# Altium PCB phantom.PcbDoc
Units mm, origin at the board's own origin, x right, y up, seen from the top; angles counter-clockwise.
Board outline 110 x 140 mm, 4 copper layers (Top, PWR, GND, Bottom), stack 0.778 mm thick; 95 components, 81 nets, 395 pads, 58 vias.
Unrouted connection lines stored in the file: 11.
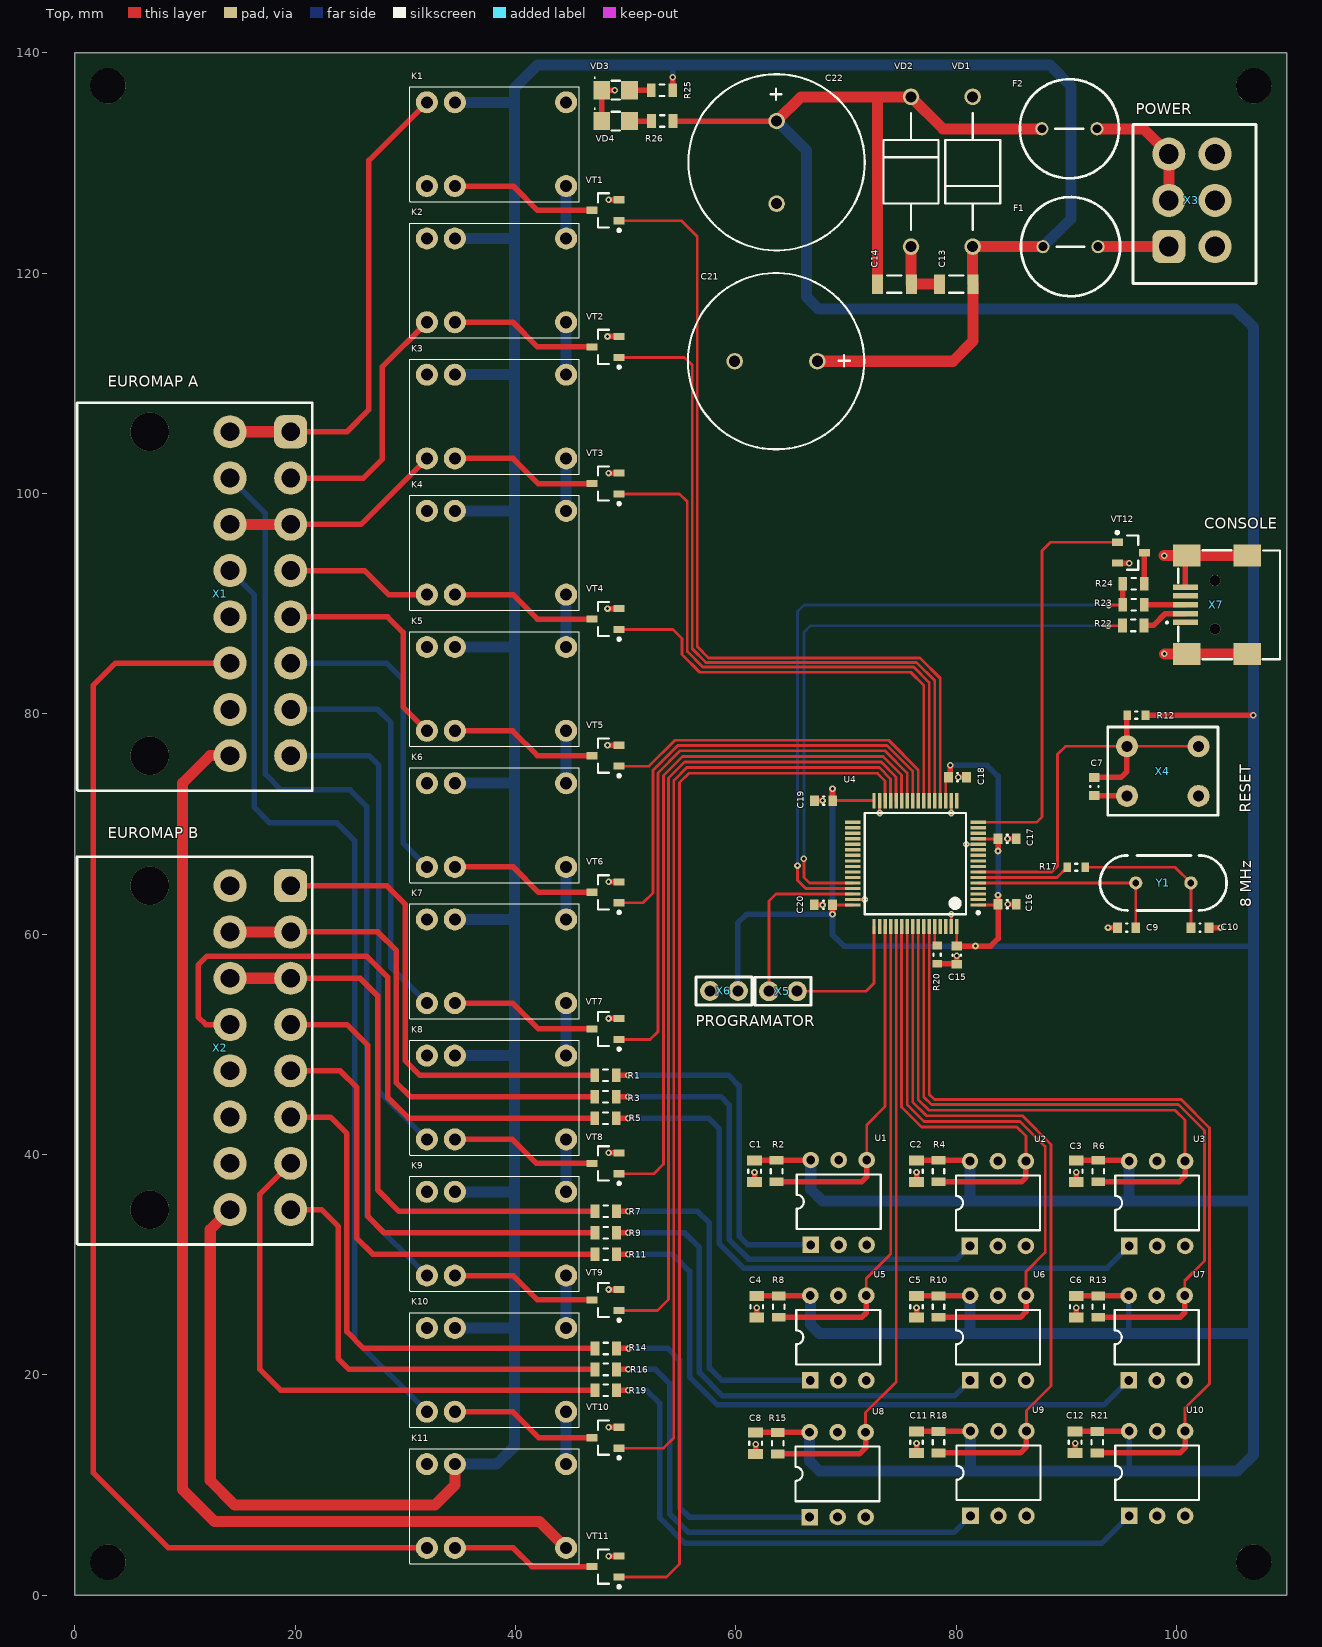
[diagram p0: Top view]
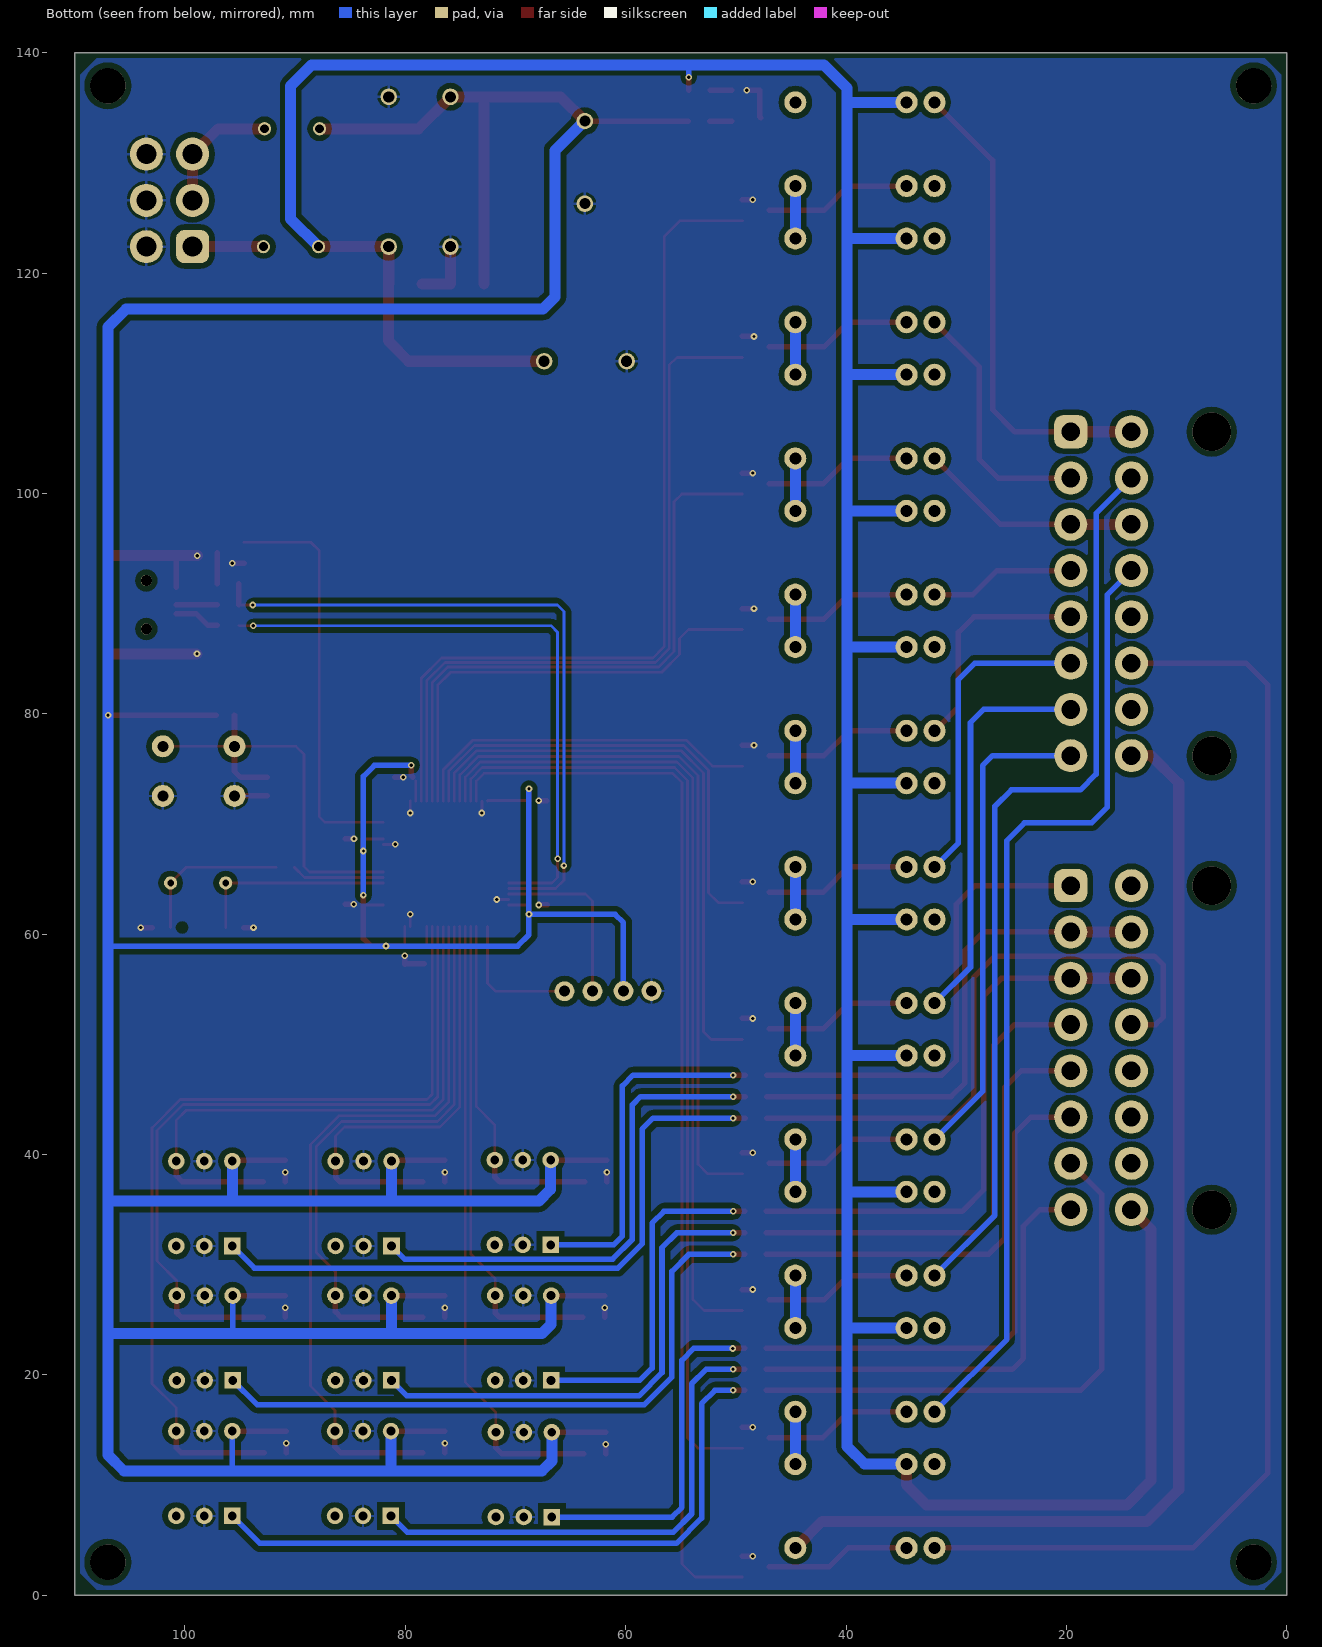
[diagram p1: Bottom view, seen from below]
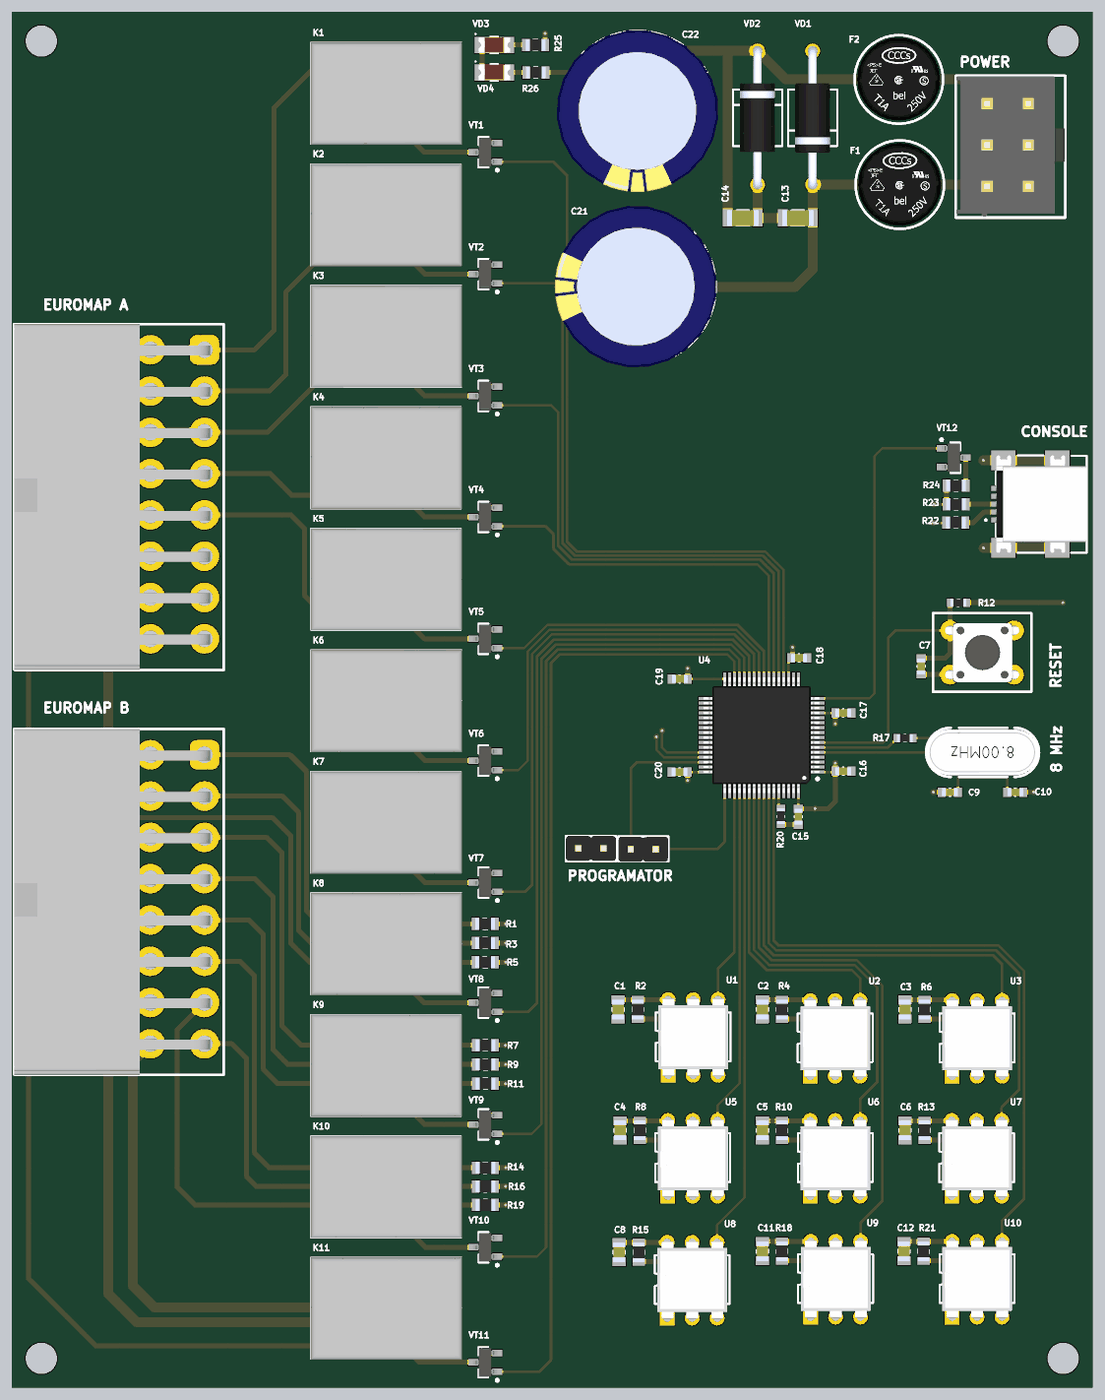
[diagram p2: 3D render of the assembled board from above, using the file's embedded part models]

## Layer stack, top to bottom
Top Solder: solder mask 0.0102, Solder Resist, Dk 3.5
Top: signal copper 0.0356
Dielectric 1: core 0.254, FR-4, Dk 4.2
PWR: signal copper 0.036
Dielectric 3: prepreg 0.127, Dk 4.2
GND: signal copper 0.036
Dielectric 2: core 0.254, Dk 4.2
Bottom: signal copper 0.0356
Bottom Solder: solder mask 0.0102, Solder Resist, Dk 3.5

## Board outline
0,0 110,0 110,140 0,140

## Design rules (kind name [scope] priority, off if disabled: settings)
Clearance [All] p1: gap=0.15 ignorepadtopadclearanceinfootprint=TRUE except(0.254: Via-Poly; 0.5: Track-Poly SMDPad-Poly THPad-Poly)
DiffPairsRouting [All] p1: maxlimit=0.254 minlimit=0.15 mostfreqgap=0.254 toplayer_minwidth=0.15 toplayer_maxwidth=0.381 toplayer_prefwidth=0.254 midlayer1_minwidth=0.15 midlayer1_maxwidth=0.381 midlayer1_prefwidth=0.254 midlayer2_minwidth=0.15 midlayer2_maxwidth=0.381 midlayer2_prefwidth=0.254 bottomlayer_minwidth=0.15 bottomlayer_maxwidth=0.381 bottomlayer_prefwidth=0.254 maxuncoupledlength=12.7
PolygonConnect [All] p1: thpad.connectstyle=Relief thpad.reliefconductorwidth=0.254 thpad.reliefentries=4 thpad.polygonreliefangle="90 Angle" thpad.airgapwidth=0.254 smdpad.connectstyle=Relief smdpad.reliefconductorwidth=0.254 smdpad.reliefentries=4 smdpad.polygonreliefangle="90 Angle" smdpad.airgapwidth=0.254 via.connectstyle=Direct via.reliefconductorwidth=0.254 via.reliefentries=4 via.polygonreliefangle="90 Angle" via.airgapwidth=0.254
RoutingVias [All] p1: holewidth=0.711 width=1.27 viastyle="Through Hole" minholewidth=0.711 minwidth=1.27 maxholewidth=0.711 maxwidth=1.27 useviatemplates=TRUE viatemplateguid#1={D7D14B3E-164A-456C-8CFF-387BE2EA7930} viatemplateguid#2={59AD5054-E988-479E-B6BC-500063E70A10} viatemplatename#1=v50h20m0mx0 viatemplatename#2=v60h30m0mx0
SolderMaskExpansion [All] p1: expansion=0.102
Width [All] p1: maxlimit=1 minlimit=0.254 preferedwidth=0.5 minimp=50.000000 maximp=50.000000 favimp=50.000000
29 further rules are at their usual default settings.

## Components (designator, comment, footprint, x,y, rotation, side; value= is the part's Value field where it differs from the comment)
C1 "0.1" CAPC2012X04N 61.7,38.5 r90 top
C2 "0.1" CAPC2012X04N 76.4,38.5 r90 top
C3 "0.1" CAPC2012X04N 90.9,38.5 r90 top
C4 "0.1" CAPC2012X04N 61.9,26.2 r90 top
C5 "0.1" CAPC2012X04N 76.4,26.2 r90 top
C6 "0.1" CAPC2012X04N 90.9,26.2 r90 top
C7 "0.1" CAPC1608X05N 92.55,73.4 r270 top
C8 "0.1" CAPC2012X04N 61.8,13.8 r90 top
C9 "12pF" CAPC1608X05N 95.475,60.6 r0 top
C10 "12pF" CAPC1608X05N 102.125,60.6 r180 top
C11 "0.1" CAPC2012X04N 76.4,13.9 r90 top
C12 "0.1" CAPC2012X04N 90.8,13.9 r90 top
C13 "0.1x50v" CAPC3216X05N 80,119 r180 top
C14 "0.1x50v" CAPC3216X05N 74.4,119 r0 top
C15 "0.1" CAPC1608X05N 80.05,58.1 r90 top
C16 "0.1" CAPC1608X05N 84.625,62.725 r180 top
C17 "0.1" CAPC1608X05N 84.625,68.65 r180 top
C18 "0.1" CAPC1608X05N 80.125,74.25 r180 top
C19 "0.1" CAPC1608X05N 67.975,72.125 r0 top
C20 "0.1" CAPC1608X05N 67.95,62.65 r0 top
C21 "1000.0x50v" C-LOW-ESR-16-18 67.4,112 r180 top
C22 "1000.0x50v" C-LOW-ESR-16-18 63.7,133.8 r270 top
F1 "RFS-4A" MRT-FUSE 90.4,122.4 r0 top
F2 "RFS-3.15A" MRT-FUSE 90.3,133.1 r0 top
K1 "NRP02-C24DH-S" R_NRP02 34.5,131.7 r0 top locked
K2 "NRP02-C24DH-S" R_NRP02 34.5,119.34 r0 top locked
K3 "NRP02-C24DH-S" R_NRP02 34.5,106.98 r0 top locked
K4 "NRP02-C24DH-S" R_NRP02 34.5,94.62 r0 top locked
K5 "NRP02-C24DH-S" R_NRP02 34.5,82.26 r0 top locked
K6 "NRP02-C24DH-S" R_NRP02 34.5,69.9 r0 top locked
K7 "NRP02-C24DH-S" R_NRP02 34.5,57.54 r0 top locked
K8 "NRP02-C24DH-S" R_NRP02 34.5,45.18 r0 top locked
K9 "NRP02-C24DH-S" R_NRP02 34.5,32.82 r0 top locked
K10 "NRP02-C24DH-S" R_NRP02 34.5,20.46 r0 top locked
K11 "NRP02-C24DH-S" R_NRP02 34.5,8.1 r0 top locked
R1 "4.7k" RESC2012X04N 48.175,47.2 r0 top
R2 "270" RESC2012X04N 63.7,38.5 r270 top
R3 "4.7k" RESC2012X04N 48.175,45.25 r0 top
R4 "270" RESC2012X04N 78.4,38.5 r270 top
R5 "4.7k" RESC2012X04N 48.175,43.3 r0 top
R6 "270" RESC2012X04N 92.9,38.5 r270 top
R7 "4.7k" RESC2012X04N 48.2,34.85 r0 top
R8 "270" RESC2012X04N 63.9,26.2 r270 top
R9 "4.7k" RESC2012X04N 48.2,32.9 r0 top
R10 "270" RESC2012X04N 78.4,26.2 r270 top
R11 "4.7k" RESC2012X04N 48.2,30.95 r0 top
R12 "3k" RESC1608X05N 96.35,79.875 r180 top
R13 "270" RESC2012X04N 92.9,26.2 r270 top
R14 "4.7k" RESC2012X04N 48.2,22.4 r0 top
R15 "270" RESC2012X04N 63.8,13.8 r270 top
R16 "4.7k" RESC2012X04N 48.2,20.5 r0 top
R17 "2.2k" RESC1608X05N 90.9,66.075 r180 top
R18 "270" RESC2012X04N 78.4,13.9 r270 top
R19 "4.7k" RESC2012X04N 48.2,18.6 r0 top
R20 "330" RESC1608X05N 78.275,58.15 r90 top
R21 "270" RESC2012X04N 92.8,13.9 r270 top
R22 "27" RESC2012X04N 96.075,88.025 r0 top
R23 "27" RESC2012X04N 96.1,89.9 r0 top
R24 "1.5k" RESC2012X04N 96.1,91.8 r180 top
R25 "5.6k" RESC2012X04N 53.3,136.6 r0 top
R26 "1k" RESC2012X04N 53.325,133.8 r0 top
U1 "H11L1M" DIP6 66.8,31.8 r90 top
U2 "H11L1M" DIP6 81.25,31.7 r90 top
U3 "H11L1M" DIP6 95.7,31.7 r90 top
U4 "STM32F072RBT6" TSQFP50P1200X1200X160-64N 76.3,66.4 r180 top locked
U5 "H11L1M" DIP6 66.76,19.5 r90 top
U6 "H11L1M" DIP6 81.26,19.5 r90 top
U7 "H11L1M" DIP6 95.66,19.5 r90 top
U8 "H11L1M" DIP6 66.7,7.1 r90 top
U9 "H11L1M" DIP6 81.3,7.2 r90 top
U10 "H11L1M" DIP6 95.7,7.2 r90 top
VD1 "P6KE27CA" P6KE27CA 81.5,136 r270 top
VD2 "P6KE6.8CA-LF" P6KE27CA 75.9,122.4 r90 top
VD3 "FYLS-1206URC (+24 ON)" CAPMP3216X11N 49.1,136.6 r0 top
VD4 "FYLS-1206UEC (+3.3 ON)" CAPMP3216X11N 49.1,133.8 r0 top
VT1 "PDTC114ET.215" SOT95P238X102-3N 48.2,125.7 r180 top
VT2 "PDTC114ET.215" SOT95P238X102-3N 48.2,113.3 r180 top
VT3 "PDTC114ET.215" SOT95P238X102-3N 48.2,100.9 r180 top
VT4 "PDTC114ET.215" SOT95P238X102-3N 48.2,88.6 r180 top
VT5 "PDTC114ET.215" SOT95P238X102-3N 48.2,76.2 r180 top
VT6 "PDTC114ET.215" SOT95P238X102-3N 48.2,63.8 r180 top
VT7 "PDTC114ET.215" SOT95P238X102-3N 48.2,51.4 r180 top
VT8 "PDTC114ET.215" SOT95P238X102-3N 48.2,39.2 r180 top
VT9 "PDTC114ET.215" SOT95P238X102-3N 48.2,26.8 r180 top
VT10 "PDTC114ET.215" SOT95P238X102-3N 48.2,14.3 r180 top
VT11 "PDTC114ET.215" SOT95P238X102-3N 48.2,2.6 r180 top
VT12 "PDTC114ET.215" SOT95P238X102-3N 95.825,94.625 r0 top
X1 "EUROMAP-A (HD CONTROL LOOP)" MINI-FIT-16-WAY-M 19.6,90.9 r90 top locked
X2 "EUROMAP-B (MACHINE CONTROL LOOP)" MINI-FIT-16-WAY-M 19.6,49.7 r90 top locked
X3 "POWER" MINI-FIT-6WAY-SM 101.4,126.6 r270 top
X4 "RESET" "TACT SWITCH" 98.75,74.8 r0 top locked
X5 "Jamper ZL201" ZL201-2 64.275,54.825 r0 top locked
X6 "Jamper ZL201" ZL201-2 58.925,54.85 r180 top locked
X7 "CONSOLE" 229-5FB-MINI-USB 109.4,89.9 r90 top locked
Y1 "8MHz" HC49LT 101.3,64.65 r180 top locked

## Footprints (in the part's own frame and the unit in brackets; to place one, negate y for a bottom-side part, rotate by r counter-clockwise, add the part's x,y. Pads: shape width x height; smd on the part's side, far side on the other; paste and mask are expansions set on the pad)
229-5FB-MINI-USB [mm]
  rect 0.5x2.25 smd: 1(-1.6,8.6) 2(-0.8,8.6) 3(0,8.6) 4(0.8,8.6) 5(1.6,8.6)
  rect 2x2.5 smd: G(-4.45,8.48) G(-4.45,2.98) G(4.45,8.48) G(4.45,2.98)
  round 1 hole 1: M(-2.2,5.9) M(2.2,5.9)
  silkscreen extent -4.95,0 4.95,10.33, body extent -4.95,0 4.95,9.25, height 3.98
C-LOW-ESR-16-18 [mm]
  round 1.5 hole 1: 1(0,0) 2(7.5,0)
  silkscreen extent -4.25,-8 11.75,8, body extent -4.35,-8.27 12.15,8.22, height 26
CAPC1608X05N [mm] "Chip Capacitor, 2-Leads, Body 1,60x0,80mm, IPC Medium Density"
  rect 0.8x0.95 smd: 1(-0.825,0) 2(0.825,0)
  silkscreen extent -0.05,-0.38 0.05,0.38, body extent -0.8,-0.4 0.8,0.4, height 0.9
CAPC2012X04N [mm] "Chip Capacitor, 2-Leads, Body 2,00x1,20mm, IPC Medium Density"
  rect 0.9x1.35 smd: 1(-0.975,0) 2(0.975,0)
  silkscreen extent -0.15,-0.58 0.15,0.58, body extent -1,-0.6 1,0.6, height 0.9
CAPC3216X05N [mm] "Chip Capacitor, 2-Leads, Body 3,20x1,60mm, IPC Medium Density"
  rect 1x1.75 smd: 1(-1.525,0) 2(1.525,0)
  silkscreen extent -0.65,-0.77 0.65,0.77, body extent -1.6,-0.8 1.6,0.8, height 1.3
CAPMP3216X11N [mm] "Molded Capacitor, 2-Leads, Body 3,20x1,60mm, IPC Medium Density"
  rect 1.5x1.65 smd: 1(-1.25,0) 2(1.25,0)
  silkscreen extent -1.95,-0.85 0.38,1.17, body extent -1.6,-0.8 1.6,0.8, height 1.1
DIP6 [mm]
  rect 1.5x1.5 hole 0.8: 1(0,0)
  round 1.5 hole 0.8: 2(0,-2.54) 3(0,-5.08) 4(7.7,-5.08) 5(7.7,-2.54) 6(7.7,0)
  silkscreen extent 1.43,-6.35 6.4,1.27, body extent -0.06,-6.12 7.81,1, height 4.7
HC49LT [mm]
  round 1.2 hole 0.6: 1(0,0) 2(5,0)
  silkscreen extent -3.25,-2.5 8.25,2.5, body extent -3.15,-2.33 8.2,2.32, height 3.6
MINI-FIT-6WAY-SM [mm]
  rrect50% 3x3 hole 1.8: 1(4.2,-2.1)
  round 3 hole 1.8: 2(0,-2.1) 3(-4.2,-2.1) 4(4.2,2.1) 5(0,2.1) 6(-4.2,2.1)
  silkscreen extent -6.88,-5.35 7.55,5.82, body extent -6.82,-5.25 7.47,5.75, height 12.8
MINI-FIT-16-WAY-M [mm]
  rrect50% 3x3 hole 1.7: 1(14.7,0)
  round 3 hole 1.7: 2(10.5,0) 3(6.3,0) 4(2.1,0) 5(-2.1,0) 6(-6.3,0) 7(-10.5,0) 8(-14.7,0) 9(14.7,5.5) 10(10.5,5.5) 11(6.3,5.5) 12(2.1,5.5) 13(-2.1,5.5) 14(-6.3,5.5) 15(-10.5,5.5) 16(-14.7,5.5)
  round 3.5 hole 3.5: ""(-14.7,12.8) ""(14.7,12.8)
  silkscreen extent -17.88,-1.95 17.32,19.4, body extent -17.87,-0.56 17.33,19.38, height 11.4
MRT-FUSE [mm]
  round 1.2 hole 0.8: 1(-2.525,0) 2(2.475,0)
  silkscreen extent -4.52,-4.5 4.47,4.5, body extent -4.27,-4.2 4.18,4.25, height 7.4
P6KE27CA [mm]
  round 1.5 hole 1: A(0,0) K(13.6,0)
  silkscreen extent 1.5,-2.5 12.1,2.5, body extent -0.41,-1.78 14.05,1.78, height 4.78
R_NRP02 [mm]
  round 2 hole 1.1: 1(-2.54,3.8) 2(-2.54,-3.8) 3(10.1,-3.8) 3(10.1,3.8) 5(0,3.8) 6(0,-3.8)
  silkscreen extent -4.1,-5.23 11.27,5.2, body extent -4.07,-5.22 11.32,5.18, height 11.4
RESC1608X05N [mm] "Chip Resistor, 2-Leads, Body 1,60x0,80mm, IPC Medium Density"
  rect 0.7x0.85 smd: 1(-0.825,0) 2(0.825,0)
  silkscreen extent -0.1,-0.33 0.1,0.33, body extent -0.8,-0.4 0.8,0.4, height 0.5
RESC2012X04N [mm] "Chip Resistor, 2-Leads, Body 2,00x1,20mm, IPC Medium Density"
  rect 0.8x1.25 smd: 1(-0.975,0) 2(0.975,0)
  silkscreen extent -0.2,-0.53 0.2,0.53, body extent -1,-0.6 1,0.6, height 0.5
SOT95P238X102-3N [mm] "SOT23, 3-Leads, Body 2,93x2,38mm, Pitch 0,95mm, IPC Medium Density"
  rect 1x0.65 smd: 1(-1.2,0.95) 2(-1.2,-0.95) 3(1.25,0)
  silkscreen extent -1.33,-1.55 0.7,1.95, body extent -1.2,-1.46 1.28,1.46, height 0.99
"TACT SWITCH" [mm]
  round 2 hole 1: 1(-3.25,2.25) 1(3.25,2.25) 2(-3.25,-2.25) 2(3.25,-2.25)
  silkscreen extent -5,-4 5,4, body extent -3.94,-3 4.04,3, height 4.9
TSQFP50P1200X1200X160-64N [mm] "TSQFP, 64-Leads, Body 10,00x10,00mm, Pitch 0,50mm, IPC Medium Density"
  rect 1.4x0.3 smd: 1(-5.7,3.75) 2(-5.7,3.25) 3(-5.7,2.75) 4(-5.7,2.25) 5(-5.7,1.75) 6(-5.7,1.25) 7(-5.7,0.75) 8(-5.7,0.25) 9(-5.7,-0.25) 10(-5.7,-0.75) 11(-5.7,-1.25) 12(-5.7,-1.75) 13(-5.7,-2.25) 14(-5.7,-2.75) 15(-5.7,-3.25) 16(-5.7,-3.75) 33(5.7,-3.75) 34(5.7,-3.25) 35(5.7,-2.75) 36(5.7,-2.25) 37(5.7,-1.75) 38(5.7,-1.25) 39(5.7,-0.75) 40(5.7,-0.25) 41(5.7,0.25) 42(5.7,0.75) 43(5.7,1.25) 44(5.7,1.75) 45(5.7,2.25) 46(5.7,2.75) 47(5.7,3.25) 48(5.7,3.75)
  rect 0.3x1.4 smd: 17(-3.75,-5.7) 18(-3.25,-5.7) 19(-2.75,-5.7) 20(-2.25,-5.7) 21(-1.75,-5.7) 22(-1.25,-5.7) 23(-0.75,-5.7) 24(-0.25,-5.7) 25(0.25,-5.7) 26(0.75,-5.7) 27(1.25,-5.7) 28(1.75,-5.7) 29(2.25,-5.7) 30(2.75,-5.7) 31(3.25,-5.7) 32(3.75,-5.7) 49(3.75,5.7) 50(3.25,5.7) 51(2.75,5.7) 52(2.25,5.7) 53(1.75,5.7) 54(1.25,5.7) 55(0.75,5.7) 56(0.25,5.7) 57(-0.25,5.7) 58(-0.75,5.7) 59(-1.25,5.7) 60(-1.75,5.7) 61(-2.25,5.7) 62(-2.75,5.7) 63(-3.25,5.7) 64(-3.75,5.7)
  silkscreen extent -5.82,-4.6 4.6,4.6, body extent -5.89,-5.89 5.89,5.89, height 1.57
ZL201-2 [mm]
  round 1.8 hole 1: 1(-1.27,0) 2(1.27,0)
  silkscreen extent -2.54,-1.27 2.54,1.27, body extent -2.56,-1.3 2.52,1.24, height 8.54

## Part data
C1 C2 C3 C4 C5 C6 C7 C8 C9 C10 C11 C12 C13 C14 C15 C16 C17 C18 C19 C20: library part C, "SMD конденсатор", Ref=http://www.kosmodrom.com.ua/prodlist.php?name=cap1206
C21 C22: library part C-LOW-ESR-RADIAL, "Выводной электролит"
F1 F2: library part FUSE, "Вставка плавкая", Ref=http://www.kosmodrom.com.ua/el.php?name=RFT-2.5A
K1 K2 K3 K4 K5 K6 K7 K8 K9 K10 K11: "Электромеханическое реле"
R1 R2 R3 R4 R5 R6 R7 R8 R9 R10 R11 R12 R13 R14 R15 R16 R17 R18 R19 R20 R21 R22 R23 R24 R25 R26: library part R, "SMD резистор", Ref=http://www.kosmodrom.com.ua/prodlist.php?name=res1206
U1 U2 U3 U5 U6 U7 U8 U9 U10: "Fairchild H11L1M Schmitt Trigger Output Optocoupler", Ref=http://www.kosmodrom.com.ua/el.php?name=H11L1M
U4: "Микроконтроллер"
VD1: "Cупрессор", Ref=https://prom.ua/p207053054-p6ke27ca;all.html
VD2: library part P6KE27CA, "Cупрессор", Ref=https://prom.ua/p207053054-p6ke27ca;all.html
VD3 VD4: library part FYLS-1206, "Светодиод", Ref=http://www.kosmodrom.com.ua/prodlist.php?page=0&name=FYLS-1206&okbutton=%CF%EE%E8%F1%EA+%EF%EE+%F1%EA%EB%E0%E4%F3
VT1 VT2 VT3 VT4 VT5 VT6 VT7 VT8 VT9 VT10 VT11 VT12: "NPN transistor with bias circuit"
X1 X2: library part MINI-FIT-16-WAY-M
X3: library part MINI-FIT-6-WAY-M
X4: library part "TACT SWITCH"
X7: library part USB-MINI, "Разъем USB-B розетка", Ref=http://www.kosmodrom.com.ua/el.php?name=229-5FB
Y1: library part CERAMIC-RESONATOR, "Кварцевый резонатор", Ref (6MHz)=http://www.kosmodrom.com.ua/el.php?name=KX-13%206.0%20MHz, Ref( 8MHz)=http://www.kosmodrom.com.ua/el.php?name=KX-13-8.0-MHz

## Free pads (board coordinates)
  round 3.2 hole 3.2 unplated: M(3,3) M(3,137) M(107,3) M(107,137)

## Via types
v1: diameter 0.6/0.6/0.6/0.6 (per signal layer), hole 0.3, Top to Bottom, tented both sides, 58 vias

## Nets (pads, with @x,y where several pads share a name; then routed paths per layer and width w, separated by ;. In a path a pad name is that pad's centre, name@x,y a point inside that pad or via, vN(x,y) a via of type N, cw(c..) or ccw(c..) an arc to the next point about the centre after c; other vN are vias at no path point)
+3.3: C1.2 C2.2 C3.2 C4.2 C5.2 C6.2 C8.2 C11.2 C12.2 C14.1 C15.2 C16.2 C17.2 C18.2 C19.2 C20.2 C22.1 F2.1 R2.1 R4.1 R6.1 R8.1 R10.1 R12.1 R13.1 R15.1 R18.1 R21.1 R26.2 U1.6 U2.6 U3.6 U4.1 U4.13 U4.19 U4.32 U4.48 U4.64 U5.6 U6.6 U7.6 U8.6 U9.6 U10.6 VD2.K X6.1 | length 526.9
  Top w0.254: C20.2 U4.48 ; C19.2 72.525,72.125 U4.32 ; U4.19 C18.2@79.05,73.925 ; C15.2 U4.64 ; U4.1 83.725,62.65 C16.2 ; U4.13 C17.2
  Top w0.5: R26.2 C22.1 ; C1.2 66.775,39.475 U1.6 ; C8.2 66.675,14.775 U8.6 ; C4.2 66.735,27.175 U5.6 ; v1(68.775,61.8) C20.2 ; v1(68.775,73.2) 68.775,72.15 C19.2 ; C11.2 81.275,14.875 U9.6 ; C5.2 81.235,27.175 U6.6 ; C2.2 81.175,39.475 U2.6 ; C18.2 79.45,74.4 v1(79.45,75.325) ; C15.2 v1(81.75,58.925) 83.125,58.925 83.8,59.6 C16.2 v1(83.8,63.55) ; v1(83.8,67.55) C17.2 ; C12.2 95.675,14.875 U10.6 ; C6.2 95.635,27.175 U7.6 ; C3.2 95.625,39.475 U3.6 ; R12.1 v1(106.975,79.875)
  Top w1: C22.1 65.9,136 72.8,136 ; C14.1 72.875,135.925 72.8,136 ; F2.1 78.8,133.1 VD2.K 72.8,136
  Bottom w0.5: X6.1 60.195,61.045 60.95,61.8 v1(68.775,61.8) ; v1(68.775,73.2) v1(68.775,61.8) ; v1(79.45,75.325) 82.8,75.325 83.8,74.325 v1(83.8,67.55) v1(83.8,63.55) ; U7.6 95.66,23.765 95.675,23.75 ; 95.7,11.3 U10.6 ; 106.975,58.875 106.925,58.925 v1(81.75,58.925) 69.8,58.925 68.775,59.95 v1(68.775,61.8)
  Bottom w1: C22.1 63.725,133.8 66.4,131.125 66.4,117.85 67.5,116.75 105.325,116.75 106.975,115.1 v1(106.975,79.875) 106.975,58.875 106.975,35.775 ; U8.6 66.7,12.175 67.575,11.3 81.275,11.3 ; U5.6 66.76,24.59 67.6,23.75 81.225,23.75 ; U1.6 66.8,36.85 67.875,35.775 81.175,35.775 ; U2.6 81.25,35.85 81.175,35.775 ; U6.6 81.26,23.785 81.225,23.75 ; U9.6 81.3,11.325 81.275,11.3 ; U3.6 95.7,35.825 95.65,35.775 ; 81.175,35.775 95.65,35.775 ; 81.225,23.75 95.675,23.75 106.975,23.75 ; 81.275,11.3 95.7,11.3 105.55,11.3 106.975,12.725 106.975,23.75 ; 95.65,35.775 106.975,35.775 ; 106.975,23.75 106.975,35.775
+3.3-IN: F2.2 X3.2 X3.3 | length 11.7
  Top w1: F2.2 97,133.1 X3.3 X3.2
+24: F1.2 X3.1 | length 6.6
  Top w0.5: F1.2@92.875,122.5 F1.2@92.975,122.4
  Top w1: F1.2 92.975,122.4 X3.1
BOOT: R20.2 U4.60 | length 2
  Top w0.254: U4.60 78.05,58.975 R20.2
C\O\R\E\-\P\U\L\L\E\R\S\-\I\N\-\P\O\S\-\1\: U4.25 VT6.1 | length 42.7
  Top w0.254: VT6.1 51.575,62.85 52.475,63.75 52.475,74.875 54.725,77.125 73.725,77.125 76.05,74.8 U4.25
C\O\R\E\-\P\U\L\L\E\R\S\-\I\N\-\P\O\S\-\2\: U4.26 VT7.1 | length 54.1
  Top w0.254: VT7.1 52.225,50.45 52.925,51.15 52.925,74.625 54.95,76.65 73.525,76.65 75.55,74.625 U4.26
C\O\R\E\-\P\U\L\L\E\R\S\-\P\O\S\-\1\-\E\N\A\: R18.2 U4.56 U9.4 | length 66.6
  Top w0.254: U4.56@76.05,60.66 76.05,44.775 77.309,43.516 86.002,43.516 88.6,40.918 88.6,19 86.38,16.78 U9.4
  Top w0.5: R18.2 85.825,12.925 86.38,13.48 U9.4
C\O\R\E\-\P\U\L\L\E\R\S\-\P\O\S\-\2\-\E\N\A\: R21.2 U4.59 U10.4 | length 80.1
  Top w0.254: U4.59 77.55,45.475 78.025,45 100.425,45 103,42.425 103,19.2 100.78,16.98 U10.4
  Top w0.5: R21.2 100.325,12.925 100.78,13.38 U10.4
CORE-PULLERS-IN-POS-1: K6.2 X1.6 | length 28.7
  Bottom w0.5: X1.6 28.3,84.6 29.8,83.1 29.8,68.26 K6.2
CORE-PULLERS-IN-POS-2: K7.2 X1.7 | length 36.4
  Bottom w0.5: X1.7 27.5,80.4 28.7,79.2 28.7,57 K7.2
CORE-PULLERS-POS-1-ENA: R16.1 X2.8 | length 40.7
  Top w0.5: X2.8 22.4,35 23.9,33.5 23.9,21.5 24.9,20.5 R16.1
CORE-PULLERS-POS-2-ENA: R19.1 X2.7 | length 51.1
  Top w0.5: X2.7 16.8,36.4 16.8,20.5 18.7,18.6 R19.1
D\E\V\I\C\E\-\E\M\G\S\: R8.2 U4.52 U5.4 | length 44.1
  Top w0.254: U5.4 71.84,28.74 74.058,30.958 U4.52@74.058,60.7
  Top w0.5: R8.2 71.425,25.225 71.84,25.64 U5.4
D\E\V\I\C\E\-\O\P\-\E\N\A\: U4.28 VT9.1 | length 76.2
  Top w0.254: VT9.1 52.9,25.85 53.9,26.85 53.9,74.175 55.35,75.625 73.2,75.625 74.55,74.275 U4.28
D\E\V\I\C\E\-\O\P\-\M\O\D\E\: R10.2 U4.55 U6.4 | length 54.1
  Top w0.254: U4.55@75.55,60.668 75.55,44.525 77.067,43.008 85.792,43.008 88.075,40.725 88.075,31.1 86.34,29.365 U6.4
  Top w0.5: R10.2 85.825,25.225 86.34,25.74 U6.4
DEVICE-EMGS: R7.1 X2.3 X2.11 | length 52.2
  Top w0.5: X2.3 25.9,56 27.5,54.4 27.5,36.8 29.45,34.85 R7.1
  Top w1: X2.11 X2.3
DEVICE-OP-ENA: K9.2 X1.10 | length 83.7
  Top w1: X1.10 X1.10@14.3,101.4
  Bottom w0.5: X1.10 17.3,98.2 17.3,74.525 18.725,73.1 25,73.1 26.5,71.6 26.5,34.48 K9.2
DEVICE-OP-MODE: R9.1 X2.4 | length 44.5
  Top w0.5: X2.4 24.7,51.8 26.6,49.9 26.6,34.38 28.08,32.9 R9.1
DEVICE-REF-POTENTIAL: K1.3 K2.3 K3.3 K4.3 K5.3 K6.3 K7.3 K8.3 K9.3 K10.3 K11.3 X1.16 | length 154
  Top w1: X1.16 12.3,76.2 9.8,73.7 9.8,9.6 12.7,6.7 42.2,6.7 K11.3@44.6,4.3
  Bottom w1: K11.3@44.6,11.9 K10.3@44.6,16.66 ; K10.3@44.6,24.26 K9.3@44.6,29.02 ; K9.3@44.6,36.62 K8.3@44.6,41.38 ; K8.3@44.6,48.98 K7.3@44.6,53.74 ; K7.3@44.6,61.34 K6.3@44.6,66.1 ; K6.3@44.6,73.7 K5.3@44.6,78.46 ; K5.3@44.6,86.06 K4.3@44.6,90.82 ; K4.3@44.6,98.42 K3.3@44.6,103.18 ; K3.3@44.6,110.78 K2.3@44.6,115.54 ; K2.3@44.6,123.14 K1.3@44.6,127.9
E\J\E\C\T\O\R\-\B\A\C\K\-\E\N\A\: R13.2 U4.58 U7.4 | length 67.4
  Top w0.254: U4.58@77.05,60.644 77.05,45.25 77.768,44.532 100.168,44.532 102.525,42.175 102.525,30.325 100.74,28.54 U7.4
  Top w0.5: R13.2 100.325,25.225 100.74,25.64 U7.4
E\J\E\C\T\O\R\-\F\O\R\W\A\R\D\-\E\N\A\: R15.2 U4.53 U8.4 | length 56.7
  Top w0.254: U8.4 71.78,16.58 74.566,19.366 U4.53@74.566,60.7
  Top w0.5: R15.2 71.225,12.825 71.78,13.38 U8.4
E\J\E\C\T\O\R\-\I\N\-\B\A\C\K\-\P\O\S\: U4.23 VT4.1 | length 41.1
  Top w0.254: VT4.1 54.3,87.65 55.125,86.825 55.125,85.375 56.725,83.775 75.875,83.775 77.05,82.6 U4.23
E\J\E\C\T\O\R\-\I\N\-\F\W\D\-\P\O\S\: U4.24 VT5.1 | length 32.1
  Top w0.254: VT5.1 52.125,75.25 54.475,77.6 73.875,77.6 76.55,74.925 U4.24
EJECTOR-BACK-ENA: R11.1 X2.5 | length 42.5
  Top w0.5: X2.5 24.1,47.6 25.6,46.1 25.6,32.4 27.05,30.95 R11.1
EJECTOR-FORWARD-ENA: R14.1 X2.6 | length 46.9
  Top w0.5: X2.6 23.2,43.4 24.7,41.9 24.7,23.92 26.22,22.4 R14.1
EJECTOR-IN-BACK-POS: K4.2 X1.4 | length 13.4
  Top w0.5: X1.4 26.3,93 28.48,90.82 K4.2
  Top w1: K4.2 K4.2@31.96,90.94
EJECTOR-IN-FWD-POS: K5.2 X1.5 | length 20.6
  Top w0.5: X1.5 28.4,88.8 29.8,87.4 29.8,80.62 K5.2
EUROMAP-SWCLK: U4.49 X5.2 | length 12.5
  Top w0.254: X5.2 71.825,54.825 72.55,55.55 U4.49
EUROMAP-SWDIO: U4.46 X5.1 | length 16
  Top w0.254: X5.1 63.005,63.005 63.65,63.65 U4.46
F\U\L\L\-\M\O\U\L\D\-\O\P\E\N\-\E\N\A\: R6.2 U3.4 U4.57 | length 53.8
  Top w0.254: U4.57@76.55,60.652 76.55,45 77.526,44.024 99.876,44.024 100.78,43.12 U3.4
  Top w0.5: R6.2 100.225,37.525 100.78,38.08 U3.4
FULL-MOULD-OPEN-ENA: R5.1 X2.12 | length 56.7
  Top w0.5: X2.12 11.9,51.8 11.2,52.5 11.2,57.2 12.004,58.004 26.496,58.004 28.4,56.1 28.4,45.2 30.3,43.3 R5.1
GND: C1.1 C2.1 C3.1 C4.1 C5.1 C6.1 C7.2 C8.1 C9.1 C10.1 C11.1 C12.1 C13.2 C14.2 C15.1 C16.1 C17.1 C18.1 C19.1 C20.1 C21.2 C22.2 R20.1 U1.2 U1.5 U2.2 U2.5 U3.2 U3.5 U4.12 U4.18 U4.31 U4.47 U4.63 U5.2 U5.5 U6.2 U6.5 U7.2 U7.5 U8.2 U8.5 U9.2 U9.5 U10.2 U10.5 VD1.A VD2.A VD3.1 VD4.1 VT1.2 VT2.2 VT3.2 VT4.2 VT5.2 VT6.2 VT7.2 VT8.2 VT9.2 VT10.2 VT11.2 VT12.2 X3.4 X3.5 X3.6 X4.2 X6.2 X7.5 X7.G | length 64.1
  Top w0.254: U4.47 v1(71.7,63.15) ; v1(73.05,71) U4.31 ; U4.63 v1(79.55,61.8) ; v1(79.55,71) U4.18 ; v1(80.9,68.15) U4.12
  Top w0.5: VD4.1@47.75,134.1 47.85,134.2 VD3.1 v1(49,136.6) ; v1(48.35,77.15) VT5.2 ; v1(48.35,89.55) VT4.2 ; v1(48.35,114.25) VT2.2 ; v1(48.45,3.55) VT11.2 ; v1(48.45,15.25) VT10.2 ; v1(48.45,27.75) VT9.2 ; v1(48.45,40.15) VT8.2 ; v1(48.45,52.35) VT7.2 ; v1(48.45,64.75) VT6.2 ; v1(48.45,101.85) VT3.2 ; v1(48.45,126.65) VT1.2 ; C1.1 v1(61.7,38.4) ; C8.1 v1(61.8,13.7) ; C4.1 v1(61.9,26.1) ; C20.1 v1(67.875,62.65) ; C19.1 v1(67.875,72.125) ; C11.1 v1(76.4,13.8) ; C5.1 v1(76.4,26.1) ; C2.1 v1(76.4,38.4) ; R20.1 80,57.325 C15.1 v1(80.05,58.05) ; v1(80.175,74.25) C18.1 C18.1@80.975,74.25 ; v1(84.654,68.653) 85.447,68.653 C17.1 ; v1(84.675,62.725) C16.1 ; C12.1 v1(90.8,13.8) ; C6.1 v1(90.9,26.1) ; C3.1 v1(90.9,38.4) ; C7.2 95.475,72.575 X4.2@95.5,72.55 ; v1(93.775,60.6) C9.1 ; VT12.2 v1(95.7,93.675) ; X7.5 100.8,94.23 X7.G@100.92,94.35 ; C10.1 v1(104,60.6)
  Top w1: VD2.A 75.9,119.025 C14.2 C13.2 ; v1(98.875,94.35) 100.92,94.35 X7.G@106.42,94.35 ; v1(98.9,85.45) 100.92,85.45 X7.G@106.42,85.45
I\N\T\E\R\-\M\O\U\L\D\-\O\P\E\N\-\P\O\S\: U4.30 VT11.1 | length 98
  Top w0.254: VT11.1 53.7,1.65 54.875,2.825 54.875,73.75 55.725,74.6 72.85,74.6 73.55,73.9 U4.30
INTER-MOULD-OPEN-POS: K11.2 X1.14 | length 117.8
  Top w0.5: X1.14 3.7,84.6 1.7,82.6 1.7,11.1 8.5,4.3 K11.2
M\A\C\H\I\N\E\-\E\M\G\S\: U4.20 VT1.1 | length 79.3
  Top w0.254: VT1.1 55.075,124.75 56.5,123.325 56.5,86.1 57.525,85.075 76.7,85.075 78.55,83.225 U4.20
M\A\C\H\I\N\E\-\S\A\F\E\T\Y\: U4.22 VT3.1 | length 53.9
  Top w0.254: VT3.1 54.9,99.95 55.6,99.25 55.6,85.65 57,84.25 76.15,84.25 77.55,82.85 U4.22
M\O\U\L\D\-\A\R\E\A\-\F\R\E\E\: R4.2 U2.4 U4.54 | length 40.6
  Top w0.254: U4.54@75.074,60.7 75.05,60.676 75.05,44.3 76.85,42.5 85.5,42.5 86.33,41.67 U2.4
  Top w0.5: R4.2 85.925,37.525 86.33,37.93 U2.4
M\O\U\L\D\-\C\L\O\S\E\-\E\N\A\: R2.2 U1.4 U4.51 | length 31.8
  Top w0.254: U1.4 71.88,42.68 73.55,44.35 U4.51
  Top w0.5: R2.2 71.425,37.525 71.88,37.98 U1.4
M\O\U\L\D\-\C\L\O\S\E\D\: U4.29 VT10.1 | length 87.6
  Top w0.254: VT10.1 53.425,13.35 54.375,14.3 54.375,73.95 55.55,75.125 73.025,75.125 74.05,74.1 U4.29
M\O\U\L\D\-\O\P\E\N\-\P\O\S\: U4.21 VT2.1 | length 66.8
  Top w0.254: VT2.1 55.35,112.35 56.05,111.65 56.05,85.9 57.279,84.671 76.404,84.671 78.05,83.025 U4.21
MACHINE-EMGS: K1.1 X1.1 X1.9 | length 43.5
  Top w0.5: X1.1 24.7,105.6 26.7,107.6 26.7,130.24 K1.1
  Top w1: X1.9 X1.1
MACHINE-REF-POTENTIAL: C13.1 C21.1 F1.1 K1.5 K2.5 K3.5 K4.5 K5.5 K6.5 K7.5 K8.5 K9.5 K10.5 K11.5 R25.2 VD1.K X2.16 | length 334.7
  Top w0.5: R25.2 v1(54.275,137.775)
  Top w1: X2.16 12.3,33.2 12.3,10.4 14.5,8.2 32.7,8.2 34.5,10 K11.5 ; C21.1 79.7,112 81.525,113.825 C13.1 81.5,119.025 VD1.K F1.1
  Bottom w0.5: v1(54.275,137.775) 54.275,138.875 54.3,138.9
  Bottom w1: K11.5 38.3,11.9 39.9,13.5 39.9,24.3 ; K10.5 39.86,24.26 39.9,24.3 ; K9.5 39.88,36.62 39.9,36.6 ; K8.5 39.72,48.98 39.9,48.8 ; K7.5 39.84,61.34 39.9,61.4 ; K6.5 39.9,73.7 ; K5.5 39.84,86.06 39.9,86 ; K4.5 39.78,98.42 39.9,98.3 ; K3.5 39.88,110.78 39.9,110.8 ; K2.5 39.66,123.14 39.9,122.9 ; K1.5 39.9,135.5 ; F1.1 90.4,124.925 90.4,137 88.5,138.9 54.3,138.9 42,138.9 39.9,136.8 39.9,135.5 ; 39.9,24.3 39.9,36.6 ; 39.9,36.6 39.9,48.8 ; 39.9,48.8 39.9,61.4 ; 39.9,61.4 39.9,73.7 ; 39.9,73.7 39.9,86 ; 39.9,86 39.9,98.3 ; 39.9,98.3 39.9,110.8 ; 39.9,110.8 39.9,122.9 ; 39.9,122.9 39.9,135.5
MACHINE-SAFETY: K3.2 X1.3 X1.11 | length 20.5
  Top w0.5: X1.3 25.98,97.2 K3.2
  Top w1: X1.11 X1.3 ; K3.2@31.96,103.06 K3.2
MOULD-AREA-FREE: R3.1 X2.2 X2.10 | length 46.3
  Top w0.5: X2.2 27.5,60.2 29.2,58.5 29.2,46.5 30.45,45.25 R3.1
  Top w1: X2.10 X2.2
MOULD-CLOSE-ENA: R1.1 X2.1 | length 43
  Top w0.5: X2.1 28.3,64.4 30,62.7 30,48.5 31.3,47.2 R1.1
MOULD-CLOSED: K10.2 X1.12 | length 87.3
  Bottom w0.5: X1.12 16.3,90.8 16.3,71.5 17.7,70.1 23.8,70.1 25.4,68.5 25.4,23.22 K10.2
MOULD-OPEN-POS: K2.2 X1.2 | length 23.1
  Top w0.5: X1.2 26.2,101.4 27.9,103.1 27.9,111.48 K2.2
NetC10_2: C10.2 R17.1 Y1.1 | length 14.2
  Top w0.254: R17.1 99.875,66.075 Y1.1 C10.2
NetK1_6: K1.6 VT1.3 | length 13.4
  Top w0.5: K1.6 39.8,127.9 42,125.7 VT1.3
NetK2_6: K2.6 VT2.3 | length 13.4
  Top w0.5: K2.6 39.76,115.54 42,113.3 VT2.3
NetK3_6: K3.6 VT3.3 | length 13.4
  Top w0.5: K3.6 39.78,103.18 42.06,100.9 VT3.3
NetK4_6: K4.6 VT4.3 | length 13.4
  Top w0.5: K4.6 39.78,90.82 42,88.6 VT4.3
NetK5_6: K5.6 VT5.3 | length 13.4
  Top w0.5: K5.6 39.74,78.46 42,76.2 VT5.3
NetK6_6: K6.6 VT6.3 | length 13.4
  Top w0.5: K6.6 39.8,66.1 42.1,63.8 VT6.3
NetK7_6: K7.6 VT7.3 | length 13.4
  Top w0.5: K7.6 39.74,53.74 42.08,51.4 VT7.3
NetK8_6: K8.6 VT8.3 | length 13.4
  Top w0.5: K8.6 39.72,41.38 41.9,39.2 VT8.3
NetK9_6: K9.6 VT9.3 | length 13.4
  Top w0.5: K9.6 39.78,29.02 42,26.8 VT9.3
NetK10_6: K10.6 VT10.3 | length 13.4
  Top w0.5: K10.6 39.74,16.66 42.1,14.3 VT10.3
NetK11_6: K11.6 VT11.3 | length 13.2
  Top w0.5: K11.6 39.8,4.3 41.5,2.6 VT11.3
NetR1_2: R1.2 U1.1 | length 32
  Top w0.5: R1.2 v1(50.25,47.2)
  Bottom w0.5: v1(50.25,47.2) 59.325,47.2 60.3,46.225 60.3,32.6 61.1,31.8 U1.1
NetR3_2: R3.2 U2.1 | length 45.9
  Top w0.5: R3.2 v1(50.25,45.25)
  Bottom w0.5: v1(50.25,45.25) 58.65,45.25 59.4,44.5 59.4,32.275 61.175,30.5 62.4,30.5 62.404,30.504 63.433,30.504 63.437,30.5 80.05,30.5 U2.1
NetR5_2: R5.2 U3.1 | length 59.1
  Top w0.5: R5.2 v1(50.25,43.3)
  Bottom w0.5: v1(50.25,43.3) 57.5,43.3 58.5,42.3 58.5,31.9 60.7,29.7 93.7,29.7 U3.1
NetR7_2: R7.2 U5.1 | length 31.7
  Top w0.5: R7.2 v1(50.225,34.85) v1@50.25,34.85
  Bottom w0.5: v1(50.225,34.85) 56.525,34.85 57.6,33.775 57.6,20.625 58.725,19.5 U5.1
NetR9_2: R9.2 U6.1 | length 45.4
  Top w0.5: R9.2 v1(50.25,32.9)
  Bottom w0.5: v1(50.25,32.9) 55.35,32.9 56.7,31.55 56.7,20.2 58.8,18.1 79.86,18.1 U6.1
NetR11_2: R11.2 U7.1 | length 58.7
  Top w0.5: R11.2 v1(50.25,30.95)
  Bottom w0.5: v1(50.25,30.95) 54.25,30.95 55.8,29.4 55.8,19.8 58.304,17.296 93.456,17.296 U7.1
NetR14_2: R14.2 U8.1 | length 31.7
  Top w0.5: R14.2 v1(50.275,22.4)
  Bottom w0.5: v1(50.275,22.4) 53.825,22.4 54.9,21.325 54.9,7.975 55.775,7.1 U8.1
NetR16_2: R16.2 U9.1 | length 45.8
  Top w0.5: R16.2 v1(50.25,20.5)
  Bottom w0.5: v1(50.25,20.5) 52.7,20.5 54,19.2 54,7.4 55.7,5.7 79.8,5.7 U9.1
NetR19_2: R19.2 U10.1 | length 59.4
  Top w0.5: R19.2 v1(50.25,18.6)
  Bottom w0.5: v1(50.25,18.6) 51.9,18.6 53.1,17.4 53.1,7 55.4,4.7 93.2,4.7 U10.1
NetR22_2: R22.2 X7.2 | length 4.2
  Top w0.5: R22.2 97.9,88.025 98.975,89.1 X7.2
NetR23_2: R23.2 X7.3 | length 3.7
  Top w0.5: R23.2 X7.3
NetR24_1: R24.1 VT12.3 | length 2.8
  Top w0.5: R24.1 VT12.3
NetR25_1: R25.1 VD3.2 | length 2
  Top w0.5: VD3.2 R25.1
NetR26_1: R26.1 VD4.2 | length 2
  Top w0.5: VD4.2 R26.1
OSC-IN: C9.2 U4.5 Y1.2 | length 18.4
  Top w0.254: U4.5 Y1.2 C9.2
OSC-OUT: R17.2 U4.6 | length 8.5
  Top w0.254: U4.6 89.15,65.15 R17.2
R\E\J\E\C\T\: U4.27 VT8.1 | length 65
  Top w0.254: VT8.1 52.55,38.25 53.425,39.125 53.425,74.4 55.15,76.125 73.375,76.125 75.05,74.45 U4.27
REJECT: K8.2 X1.8 | length 44.1
  Bottom w0.5: X1.8 26.7,76.2 27.6,75.3 27.6,45.74 K8.2
RESET: C7.1 R12.2 U4.7 X4.1 | length 39
  Top w0.254: U4.7 88.7,65.65 89.2,66.15 89.2,76.325 89.925,77.05 95.5,77.05 X4.1@102,77.05
  Top w0.5: C7.1 94.95,74.225 95.5,74.775 95.5,77.05 95.5,79.85 R12.2
USB-DN: R22.1 U4.44 | length 56.1
  Top w0.254: v1(66.175,66.85) 66.175,66.466 66.177,66.464 66.177,65.148 66.675,64.65 U4.44 ; v1(93.8,88) 95.075,88 R22.1
  Bottom w0.254: v1(66.175,66.85) 66.175,87.4 66.775,88 v1(93.8,88)
USB-DP: R23.1 R24.2 U4.45 | length 61.4
  Top w0.254: v1(65.6,66.225) 65.6,64.9 66.35,64.15 U4.45 ; v1(93.85,89.875) 95.1,89.875 R23.1
  Top w0.5: R23.1 R24.2
  Bottom w0.254: v1(65.6,66.225) 65.598,66.227 65.598,89.273 66.2,89.875 v1(93.85,89.875)
USB-RESET: U4.16 VT12.1 | length 37.3
  Top w0.254: U4.16 87.3,70.15 87.8,70.65 87.8,94.8 88.575,95.575 VT12.1
pads on no net: K1.2 K2.1 K3.1 K4.1 K5.1 K6.1 K7.1 K8.1 K9.1 K10.1 K11.1 U1.3 U2.3 U3.3 U4.2 U4.3 U4.4 U4.8 U4.9 U4.10 U4.11 U4.14 U4.15 U4.17 U4.33 U4.34 U4.35 U4.36 U4.37 U4.38 U4.39 U4.40 U4.41 U4.42 U4.43 U4.50 U4.61 U4.62 U5.3 U6.3 U7.3 U8.3 U9.3 U10.3 X1. X1.13 X1.15 X2. X2.9 X2.13 X2.14 X2.15 X7.1 X7.4 X7.M

## Polygon pours and split planes (outlines as drawn)
GND on Bottom "Bottom-No Net" (solid, remove dead copper, pour order 0): 0.5,138 2,139.5 108,139.5 109.5,138 109.5,2 108,0.5 2,0.5 2,0.6 0.5,2.1

## Silkscreen, mask and mechanical layers (free items; w line width, h text height)
Top Overlay:
  text "POWER" at 96.3,134.4 h1
  text "EUROMAP A" at 3,109.7 h1
  text "CONSOLE" at 102.5,96.8 h1
  text "RESET" at 106.725,71 h1 r90
  text "EUROMAP B" at 3,68.7 h1
  text "8 MHz" at 106.8,62.425 h1 r90
  text "PROGRAMATOR" at 56.35,51.625 h1
Board:
  the board outline again, w0.5